# EAGLE board BLDC Motor Driver (EAGLE 7.3.0)
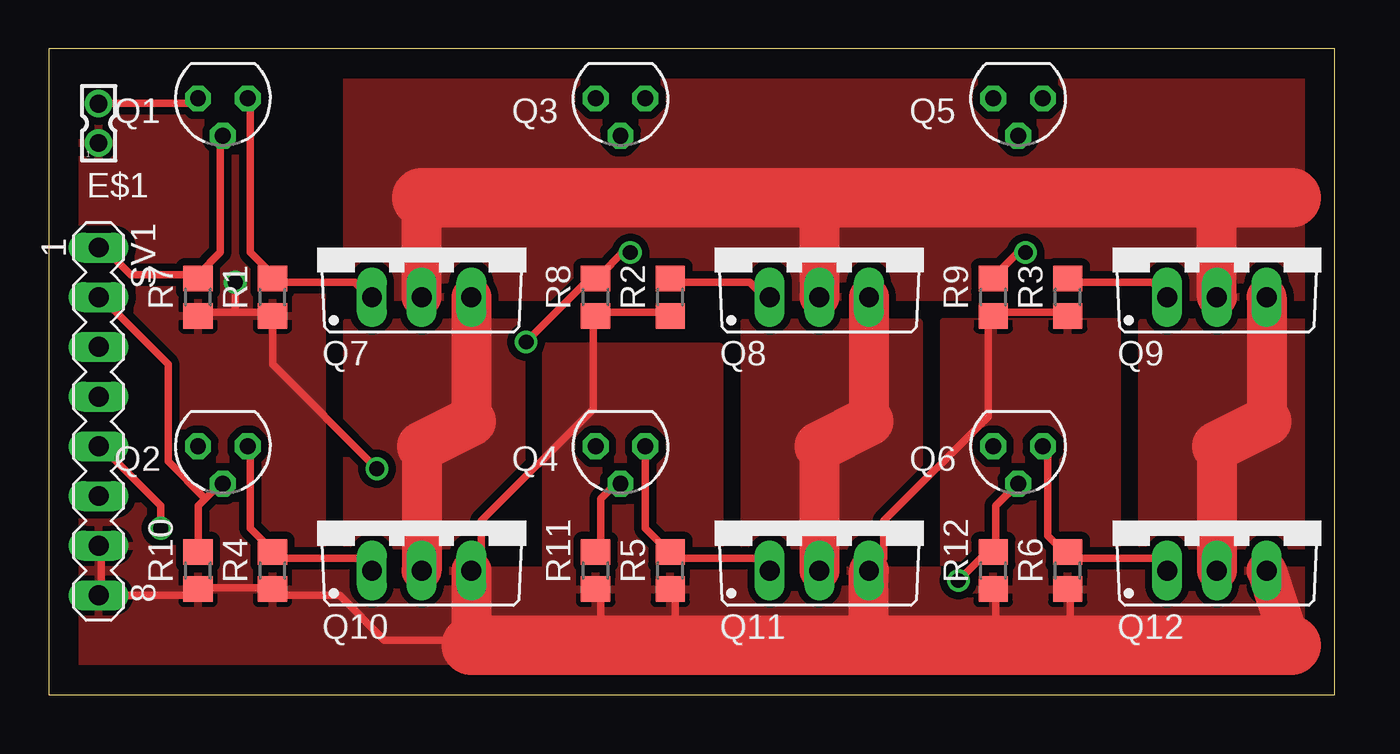
[diagram p0: board, top side]
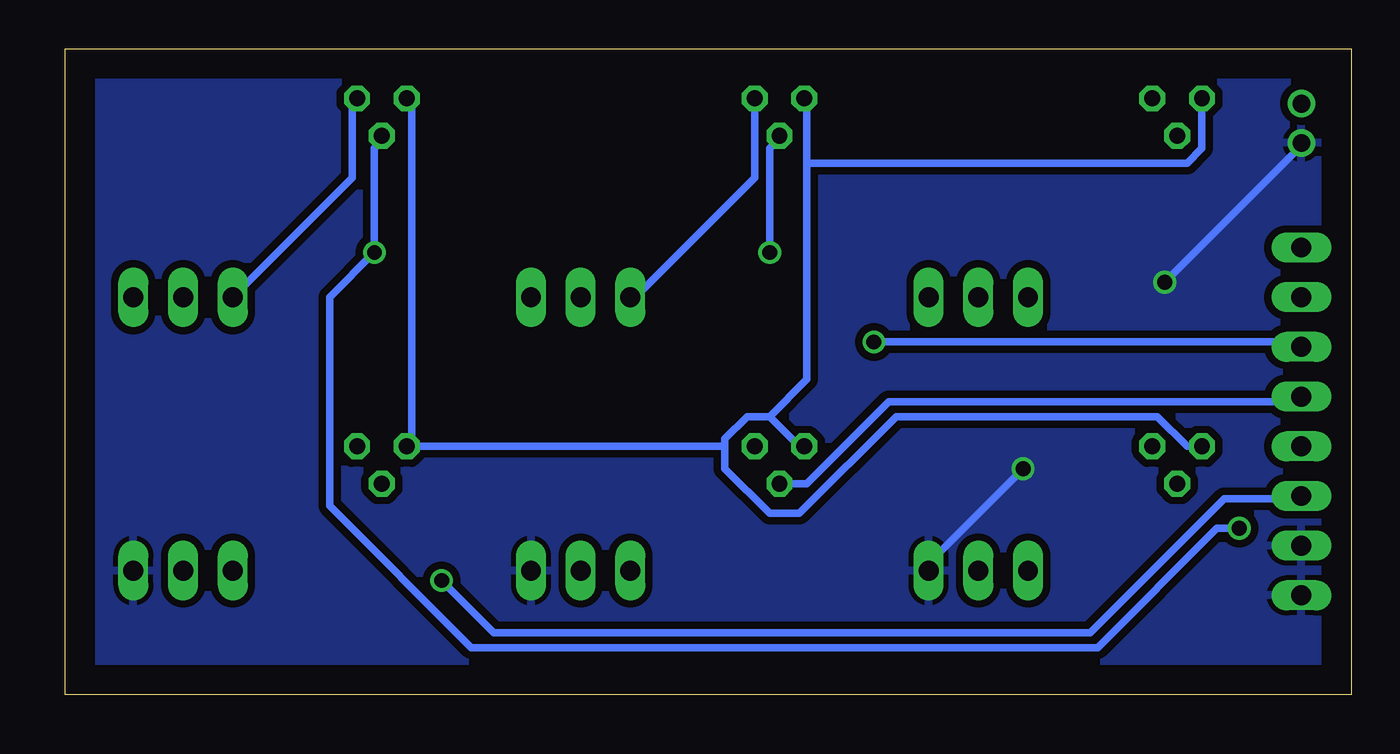
[diagram p1: board, bottom side, seen from below]

Size 65.71 x 33.01 mm. Coordinates in mm from the lower left corner, seen from the top.
Outline: 0,0 65.71,0 65.71,33.01 0,33.01 0,0
Copper layers (1*16): Top 0.035mm / dielectric 1.5mm / Bottom 0.035mm
Design rules "default *": minimum track width 10mil, minimum drill 24mil, track to track 8mil, track to pad 8mil, pad to pad 8mil, via to via 8mil, smd to smd 8mil, copper to edge 60mil, drill to drill 8mil, minimum pad ring 10mil, minimum via ring 8mil, stop-mask expansion 4mil, vias tented up to drill 0mil, thermal gap 10mil
Net classes: 0 default: width 0.381 mm, drill 0.762 mm, clearance 0.381 mm

## Footprints (pad centres in the part's own frame; a part is rotated, then mirrored left to right if it is on the bottom)
332-02 = drill 0.9 pad 1.27: 1 0,-1; 2 0,1
SOT54E = drill 0.813 octagon: D -1.27,0; G 0,1.905; S 1.27,0
TO220BV = drill 1.016 long: D 0,-2.54; G -2.54,-2.54; S 2.54,-2.54
R0805 = smd 1.3 x 1.5: 1 -0.95,0; 2 0.95,0
MA08-1 = drill 1.016 long: 1 -8.89,0; 2 -6.35,0; 3 -3.81,0; 4 -1.27,0; 5 1.27,0; 6 3.81,0; 7 6.35,0; 8 8.89,0

## Placement (x,y rotation side)
E$1  [332-02]  2.54,29.21 0 top
Q1  BS250  [SOT54E]  8.89,30.48 180 top
Q2  BS250  [SOT54E]  8.89,12.7 180 top
Q3  BS250  [SOT54E]  29.21,30.48 180 top
Q4  BS250  [SOT54E]  29.21,12.7 180 top
Q5  BS250  [SOT54E]  49.53,30.48 180 top
Q6  BS250  [SOT54E]  49.53,12.7 180 top
Q7  IRF740  [TO220BV]  19.05,22.86 0 top
Q8  IRF740  [TO220BV]  39.37,22.86 0 top
Q9  IRF740  [TO220BV]  59.69,22.86 0 top
Q10  IRF740  [TO220BV]  19.05,8.89 0 top
Q11  IRF740  [TO220BV]  39.37,8.89 0 top
Q12  IRF740  [TO220BV]  59.69,8.89 0 top
R1  10k  [R0805]  11.43,20.32 90 top
R2  10k  [R0805]  31.75,20.32 90 top
R3  10k  [R0805]  52.07,20.32 90 top
R4  10k  [R0805]  11.43,6.35 90 top
R5  10k  [R0805]  31.75,6.35 90 top
R6  10k  [R0805]  52.07,6.35 90 top
R7  10k  [R0805]  7.62,20.32 90 top
R8  10k  [R0805]  27.94,20.32 90 top
R9  10k  [R0805]  48.26,20.32 90 top
R10  10k  [R0805]  7.62,6.35 90 top
R11  10k  [R0805]  27.94,6.35 90 top
R12  10k  [R0805]  48.26,6.35 90 top
SV1  [MA08-1]  2.54,13.97 270 top

## Library data of the parts
E$1 = con-garry
Q1-Q6 = transistor-small-signal
Q7-Q12 = transistor-power
R1-R12 = resistor
SV1 = con-lstb; OC_FARNELL: unknown; OC_NEWARK: unknown

## Nets
16V: E$1.2 Q1.S Q2.S Q3.S Q4.S Q5.S Q6.S
BATTPOS: Q7.D Q8.D Q9.D
GND: E$1.1 Q10.S Q11.S Q12.S R1.1 R2.1 R3.1 R4.1 R5.1 R6.1 R7.1 R8.1 R9.1 R10.1 R11.1 R12.1 SV1.7 SV1.8
N$1: Q1.D Q7.G R1.2
N$2: Q3.D Q8.G R2.2
N$3: Q5.D Q9.G R3.2
N$4: Q2.D Q10.G R4.2
N$5: Q4.D Q11.G R5.2
N$6: Q6.D Q12.G R6.2
PHASEA: Q7.S Q10.D
PHASEB: Q8.S Q11.D
PHASEC: Q9.S Q12.D
PIN1: Q1.G R7.2 SV1.1
PIN2: Q2.G R10.2 SV1.2
PIN3: Q3.G R8.2 SV1.3
PIN4: Q4.G R11.2 SV1.4
PIN5: Q5.G R9.2 SV1.5
PIN6: Q6.G R12.2 SV1.6

## Tracks (layer width: path | path; a pad name or v marks a point on that pad's centre or on a via)
16V
  Top 0.381: Q1.S 7.62,30.23 2.67,30.23 E$1.2
  Bottom 0.381: Q2.S 8.38,12.7 9.91,14.22 23.24,14.22 28.19,9.27 29.72,9.27 32,11.56 32,12.7 | 32,12.7 32,13.08 30.86,14.22 29.72,14.22 | 29.72,14.22 28.19,12.7 Q4.S | 27.81,27.18 27.81,16.13 29.72,14.22 | 27.81,27.18 27.81,30.23 Q3.S | 32,12.7 48.01,12.7 | 48.01,12.7 48.01,30.23 Q5.S | 48.01,12.7 Q6.S | Q1.S 7.62,27.94 8.38,27.18 27.81,27.18
BATTPOS
  Top 2.032: Q7.D 19.05,25.4 | 39.37,25.4 Q8.D | Q9.D 59.69,25.4
  Top 3.048: 19.05,25.4 39.37,25.4 59.69,25.4 63.5,25.4
  pour Top: 15.24,33.02 66.04,33.02 66.04,20.32 15.24,20.32
GND  (via drill 0.76)
  Top 0.381: 9.53,19.56 11.43,19.56 R1.1 11.43,16.89 v16.76,11.56 | 9.53,19.56 7.62,19.56 R7.1 | v9.53,21.08 9.53,19.56 | 2.67,5.08 7.62,5.08 R10.1 7.62,5.46 11.43,5.46 R4.1 11.43,5.08 14.86,5.08 17.14,2.79 20.19,2.79 21.59,2.54 | 2.67,5.08 2.67,7.37 SV1.7 | 2.67,5.08 SV1.8 | R3.1 51.82,19.56 48.39,19.56 R9.1 48.01,19.18 48.01,14.22 42.67,8.89 42.67,6.98 Q11.S | R2.1 31.62,19.56 28.19,19.56 R8.1 27.81,19.18 27.81,14.6 22.1,8.89 22.1,6.98 Q10.S | R11.1 28.19,5.08 28.19,2.54 | R5.1 32,5.08 32,2.54 | R12.1 48.39,5.08 48.39,2.54 | R6.1 52.2,5.08 52.2,2.54
  Top 2.032: Q10.S 21.59,2.54 | 41.91,2.54 Q11.S | Q12.S 63.5,2.54
  Top 3.048: 21.59,2.54 28.19,2.54 32,2.54 41.91,2.54 48.39,2.54 52.2,2.54 63.5,2.54
  Bottom 0.381: v9.53,21.08 2.67,27.94 E$1.1 | v16.76,11.56 21.72,6.6 Q10.S
  pour Top: 0,33.02 0,0 66.04,0 66.04,6.35 54.61,6.35 54.61,19.05 45.72,19.05 45.72,6.35 34.29,6.35 34.29,17.78 25.4,17.78 25.4,6.35 13.97,6.35 13.97,33.02
  pour Bottom: 0,33.02 66.04,33.02 66.04,0 0,0
N$1
  Top 0.381: Q7.G 16.38,20.32 15.62,21.08 11.43,21.08 R1.2 11.43,21.46 10.29,22.61 10.29,30.23 Q1.D
N$2
  Top 0.381: R2.2 32,21.08 35.81,21.08 36.58,20.32 Q8.G
  Bottom 0.381: Q3.D 30.48,26.42 36.58,20.32 Q8.G
N$3
  Top 0.381: Q9.G 56.39,21.08 52.2,21.08 R3.2
  Bottom 0.381: Q9.G 51.05,26.42 51.05,30.23 Q5.D
N$4
  Top 0.381: Q10.G 16.38,6.6 16,6.98 11.43,6.98 R4.2 11.43,7.37 10.29,8.51 10.29,12.7 Q2.D
N$5
  Top 0.381: Q11.G 36.2,6.98 32,6.98 R5.2 31.62,7.37 30.48,8.51 Q4.D
N$6
  Top 0.381: Q12.G 57.15,6.6 56.77,6.98 52.2,6.98 R6.2 51.82,7.37 51.05,8.13 51.05,12.7 Q6.D
PHASEA
  Top 2.032: Q7.S 21.59,13.97 | 19.05,12.7 Q10.D
  Top 2.54: 21.59,13.97 19.05,12.7
  pour Top: 15.24,19.05 24.13,19.05 24.13,7.62 15.24,7.62
PHASEB
  Top 2.032: Q8.S 41.91,13.97 | 39.37,12.7 Q11.D
  Top 2.54: 41.91,13.97 39.37,12.7
  pour Top: 35.56,19.05 44.45,19.05 44.45,7.62 35.56,7.62
PHASEC
  Top 2.032: Q9.S 62.23,13.97 | 59.69,12.7 Q12.D
  Top 2.54: 62.23,13.97 59.69,12.7
  pour Top: 55.88,19.05 64.77,19.05 64.77,7.62 55.88,7.62
PIN1
  Top 0.381: 7.62,21.46 4.19,21.46 2.67,22.99 SV1.1 | 7.62,21.46 8.76,22.61 8.76,28.32 Q1.G | 7.62,21.46 R7.2
PIN2
  Top 0.381: R10.2 7.62,9.65 8,10.03 | 8,10.03 8.76,10.8 Q2.G | 8,10.03 6.1,11.94 6.1,16.89 2.67,20.32 SV1.2
PIN3  (via drill 0.76)
  Top 0.381: v29.72,22.61 29.34,22.61 28.19,21.46 R8.2 27.81,21.46 v24.38,18.03
  Bottom 0.381: v29.72,22.61 29.72,27.94 29.34,28.32 Q3.G | v24.38,18.03 2.67,18.03 SV1.3
PIN4
  Top 0.381: R11.2 28.19,7.37 28.19,10.03 28.96,10.8 Q4.G
  Bottom 0.381: Q4.G 27.81,10.8 23.62,14.99 2.67,14.99 SV1.4
PIN5  (via drill 0.76)
  Top 0.381: v49.91,22.61 49.53,22.61 48.39,21.46 R9.2 | v5.71,8.51 5.71,9.65 2.67,12.7 SV1.5
  Bottom 0.381: Q5.G 49.53,28.32 49.91,27.94 v49.91,22.61 52.2,20.32 52.2,9.65 44.96,2.41 12.95,2.41 6.86,8.51 v5.71,8.51
PIN6  (via drill 0.76)
  Top 0.381: Q6.G 48.39,9.65 48.39,7.37 R12.2 48.01,7.37 v46.48,5.84
  Bottom 0.381: v46.48,5.84 43.81,3.17 13.33,3.17 6.48,10.03 2.67,10.03 SV1.6